# EAGLE board Schematic_tema_tsc_pcb (EAGLE 9.7.0)
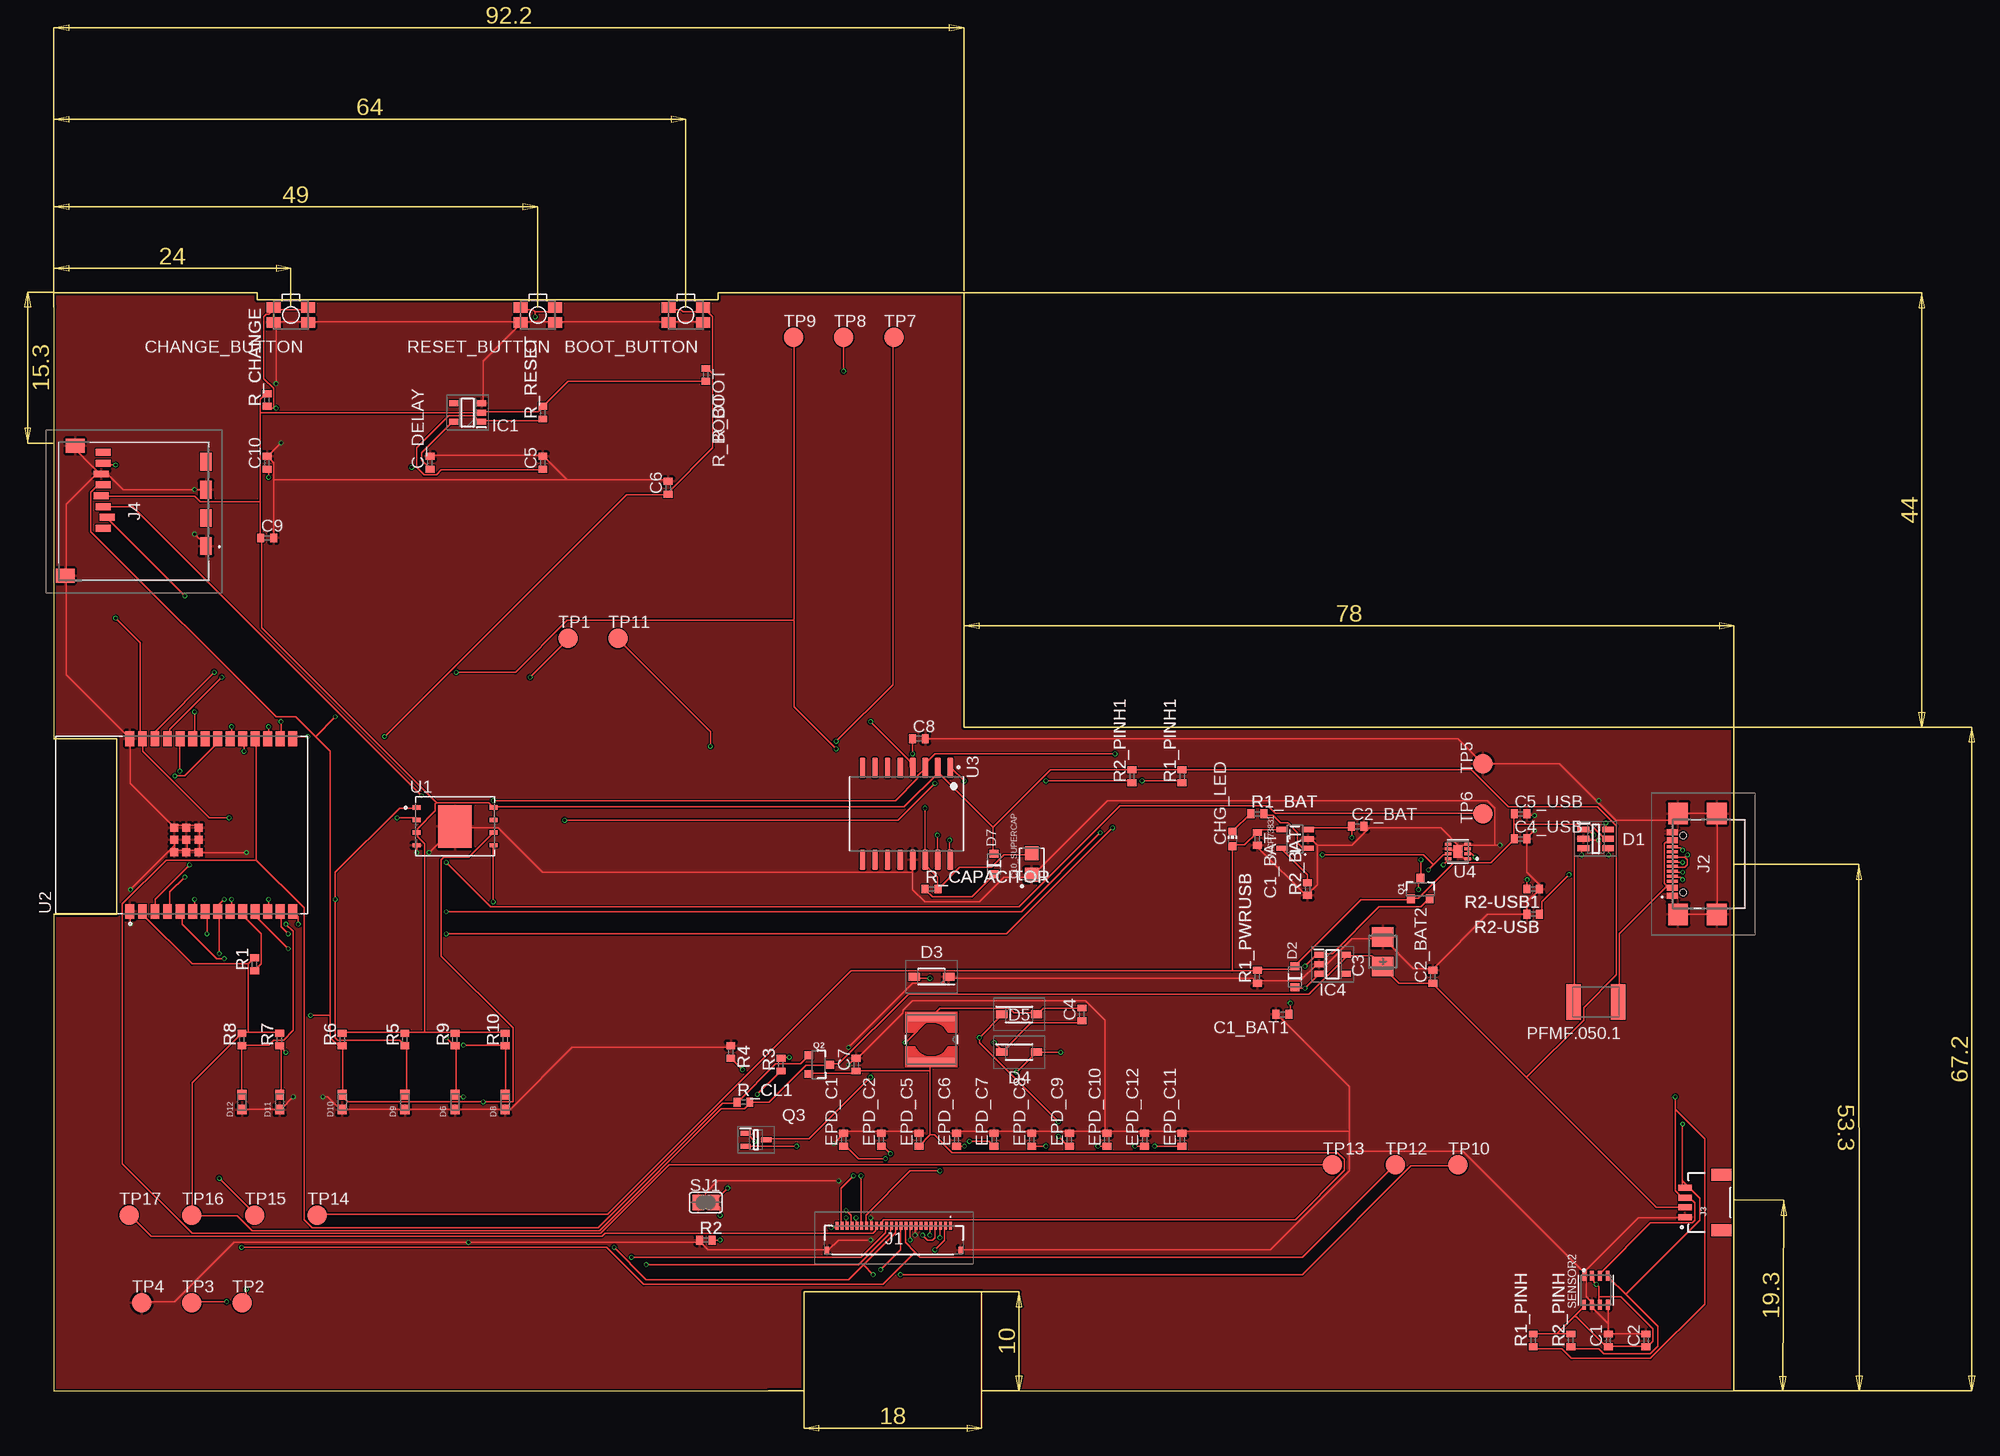
[diagram p0: board, top side]
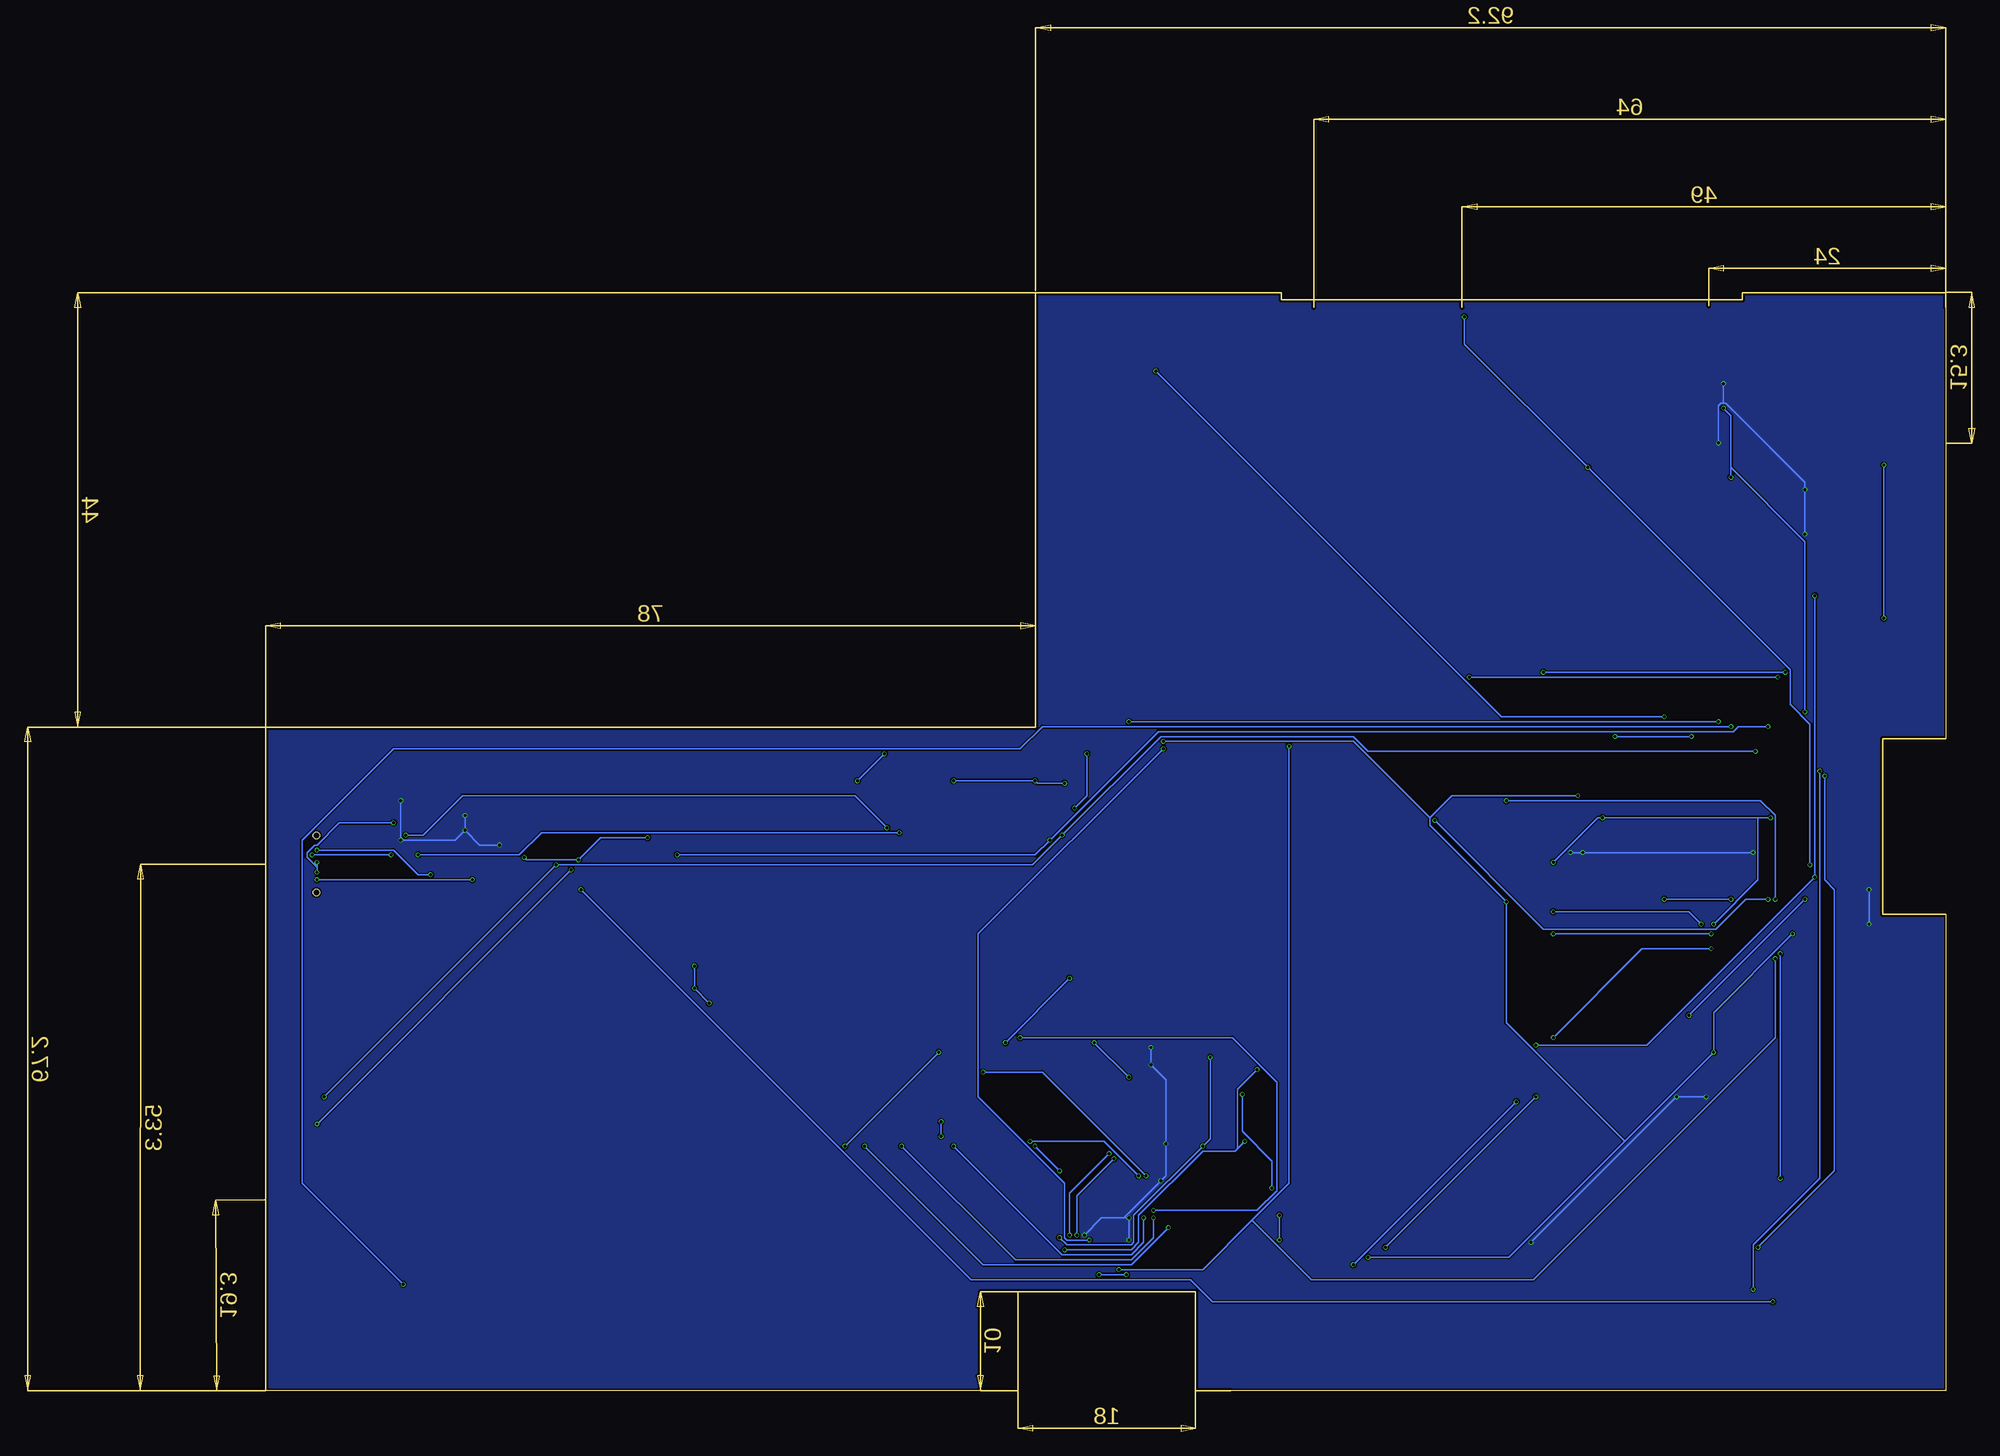
[diagram p1: board, bottom side, seen from below]

Size 170.2 x 111.2 mm. Coordinates in mm from the lower left corner, seen from the top.
Outline: 0,0 72.39,0 75.98,0 75.98,10 93.98,10 93.98,0 170.2,0 170.2,67.2 92.2,67.2 92.2,111.2 67.28,111.2 67.28,110.49 20.61,110.49 20.61,111.2 0,111.2 0,66.04 6.35,66.04 6.35,48.26 0,48.26 0,0
Copper layers (1*16): Top 0.035mm / dielectric 1.6mm / Bottom 0.035mm
Design rules "jlcpcb-2layers.dru": minimum track width 0.15mm, minimum drill 0.3mm, track to track 5mil, track to pad 5mil, pad to pad 5mil, via to via 5mil, smd to smd 5mil, copper to edge 0.2mm, drill to drill 6mil, minimum pad ring 10mil, minimum via ring 3mil, stop-mask expansion 4mil, vias tented up to drill 0mil, thermal gap 10mil

## Footprints (pad centres in the part's own frame; a part is rotated, then mirrored left to right if it is on the bottom)
MYBUTTON = smd 1.4 x 1.05: 1 1.75,0.75; 2 -1.75,0.75; 3 -1.75,-0.75; 4 1.75,-0.75
EAGLE-LTSPICE_C0402 = smd 0.7 x 0.9: 1 -0.65,0; 2 0.65,0
RCL_CT3528 = smd 2 x 2.2: + -1.5,0; - 1.5,0
CAPCP3225X100N = smd 1.4 x 1.4: 1 -1.1,0; 2 1.1,0
ADAFRUIT_CHIP-LED0603 = smd 0.8 x 0.8: A 0,-0.75; C 0,0.75
SOT95P280X145-6N = smd 1.2 x 0.6: 1 -1.25,0.95; 2 -1.25,0; 3 -1.25,-0.95; 4 1.25,-0.95; 5 1.25,0; 6 1.25,0.95
ESP32_WROVER_AVX---SD0805S020S1R0_AVX_SD0805S020S1R0_0 = smd 0.8 x 0.9: 1 -1.05,0; 2 1.05,0
SOD3716X135N = smd 1.15 x 0.8: 1 -1.75,0; 2 1.75,0
DIOC1608X36N = smd 0.97 x 0.94: 1 -0.75,0; 2 0.75,0
SOT95P280X125-5N = smd 0.9 x 0.6: 1 -1.4,0.95; 2 -1.4,0; 3 -1.4,-0.95; 4 1.4,-0.95; 5 1.4,0.95
SOT95P280X120-5N = smd 0.9 x 0.6: 1 -1.4,0.95; 2 -1.4,0; 3 -1.4,-0.95; 4 1.4,-0.95; 5 1.4,0.95
FH34SRJ24S05SH99 = smd 0.3 x 0.8: 1 5.75,1.45; 2 5.25,1.45; 3 4.75,1.45; 4 4.25,1.45; 5 3.75,1.45; 6 3.25,1.45; 7 2.75,1.45; 8 2.25,1.45; 9 1.75,1.45; 10 1.25,1.45; 11 0.75,1.45; 12 0.25,1.45; 13 -0.25,1.45; 14 -0.75,1.45; 15 -1.25,1.45; 16 -1.75,1.45; 17 -2.25,1.45; 18 -2.75,1.45; 19 -3.25,1.45; 20 -3.75,1.45; 21 -4.25,1.45; 22 -4.75,1.45; 23 -5.25,1.45; 24 -5.75,1.45 | smd 0.4 x 0.8: MP1 6.75,-1.05; MP2 -6.75,-1.05
SAMACSYS_PARTS_USB4110GFA = smd 0.3 x 1.15: A1 -3.35,3.678; A4 -2.55,3.678; A5 -1.25,3.678; A6 -0.25,3.678; A7 0.25,3.678; A8 1.25,3.678; A9 2.55,3.678; A12 3.35,3.678; B1 3.05,3.678; B4 2.25,3.678; B5 1.75,3.678; B6 0.75,3.678; B7 -0.75,3.678; B8 -1.75,3.678; B9 -2.25,3.678; B12 -3.05,3.678 | smd 2.18 x 2: MP1 -5.11,-0.827; MP2 5.11,-0.827; MP3 -5.11,3.103; MP4 5.11,3.103 | hole 0.65: -2.89,2.603; 2.89,2.603
JST04_1MM_RA = smd 0.6 x 1.35: 1 -1.5,0; 2 -0.5,0; 3 0.5,0; 4 1.5,0 | smd 1.2 x 2: NC1 2.8,-3.675; NC2 -2.8,-3.675
112ATAARR03ATTEND = smd 1.8 x 1.2: G1 10.6,10.4; G2 4.9,10.4; S1 7.75,10.4; S2 2.05,10.4 | smd 1.4 x 1.9: G3 13.6,-3.85; G4 0.45,-2.85 | smd 0.7 x 1.5: P1 8.8,0; P2 7.7,0.4; P3 6.6,0; P4 5.5,-0.2; P5 4.4,0; P6 3.3,-0.2; P7 2.2,0; P8 1.1,0
IND_4828-WE-TPC_WRE = smd 0.889 x 4.826: 1 -2.286,0; 2 2.286,0
ESP32_WROVER_SPARKFUN-IC-POWER_SOT23-5 = smd 0.55 x 1.2: 1 -0.95,-1.3; 2 0,-1.3; 3 0.95,-1.3; 4 0.95,1.3; 5 -0.95,1.3
ESP32C6_VARISTOR_CT/CN1812 = smd 1.5 x 3.6: 1 -2.25,0; 2 2.25,0
ESP32_WROVER_SPARKFUN-DISCRETESEMI_SOT23-3 = smd 0.8 x 0.9: 1 -0.95,-1; 2 0.95,-1; 3 0,1.1
SOT65P210X110-3N = smd 1.05 x 0.5: 1 -1.05,0.65; 2 -1.05,-0.65; 3 1.05,0
ESP32_WROVER_EAGLE-LTSPICE_R0402 = smd 0.7 x 0.9: 1 -0.65,0; 2 0.65,0
ESP32_WROVER_BME680_PSON80P300X300X100-8N = smd 1.016 x 0.5: 1 1.458,1.2; 2 1.458,0.4; 3 1.458,-0.4; 4 1.458,-1.2; 5 -1.458,-1.22; 6 -1.458,-0.4; 7 -1.458,0.4; 8 -1.458,1.2
SJ = smd 1.168 x 1.6: 1 -0.762,0; 2 0.762,0
TP20R = smd 2 x 2: TP 0,0
SON127P600X800X80-9N = smd 0.94 x 0.44: 1 -3.895,1.905; 2 -3.895,0.635; 3 -3.895,-0.635; 4 -3.895,-1.905; 5 3.895,-1.905; 6 3.895,-0.635; 7 3.895,0.635; 8 3.895,1.905 | smd 3.4 x 4.3: 9 0,0
XCVR_ESP32-C6-WROOM-1-N8 = smd 1.5 x 0.9: 1 -8.75,5.26; 2 -8.75,3.99; 3 -8.75,2.72; 4 -8.75,1.45; 5 -8.75,0.18; 6 -8.75,-1.09; 7 -8.75,-2.36; 8 -8.75,-3.63; 9 -8.75,-4.9; 10 -8.75,-6.17; 11 -8.75,-7.44; 12 -8.75,-8.71; 13 -8.75,-9.98; 14 -8.75,-11.25; 15 8.75,-11.25; 16 8.75,-9.98; 17 8.75,-8.71; 18 8.75,-7.44; 19 8.75,-6.17; 20 8.75,-4.9; 21 8.75,-3.63; 22 8.75,-2.36; 23 8.75,-1.09; 24 8.75,0.18; 25 8.75,1.45; 26 8.75,2.72; 27 8.75,3.99; 28 8.75,5.26 | smd 0.8 x 0.8: 29_1 -2.755,0.79; 29_2 -1.505,0.79; 29_3 -0.255,0.79; 29_4 -2.755,-0.46; 29_5 -1.505,-0.46; 29_6 -0.255,-0.46; 29_7 -2.755,-1.71; 29_8 -1.505,-1.71; 29_9 -0.255,-1.71
SOIC127P1032X265-16N = smd 2.05 x 0.59: 1 -4.655,4.445; 2 -4.655,3.175; 3 -4.655,1.905; 4 -4.655,0.635; 5 -4.655,-0.635; 6 -4.655,-1.905; 7 -4.655,-3.175; 8 -4.655,-4.445; 9 4.655,-4.445; 10 4.655,-3.175; 11 4.655,-1.905; 12 4.655,-0.635; 13 4.655,0.635; 14 4.655,1.905; 15 4.655,3.175; 16 4.655,4.445
SON50P200X200X80-9N = smd 0.76 x 0.27: 1 -0.985,0.75; 2 -0.985,0.25; 3 -0.985,-0.25; 4 -0.985,-0.75; 5 0.985,-0.75; 6 0.985,-0.25; 7 0.985,0.25; 8 0.985,0.75 | smd 0.9 x 1.3: 9 0,0

## Placement (x,y rotation side)
BOOT_BUTTON  BUTTON_CUSYOMV1  [MYBUTTON]  64.01,108.94 180 top
C1  100nF  [EAGLE-LTSPICE_C0402]  157.48,5.08 90 top
C1_BAT  4.7uF  [EAGLE-LTSPICE_C0402]  121.92,55.88 270 top
C1_BAT1  4.7uF  [EAGLE-LTSPICE_C0402]  124.46,38.1 180 top
C2  100nF  [EAGLE-LTSPICE_C0402]  161.29,5.08 90 top
C2_BAT  4.7uF  [EAGLE-LTSPICE_C0402]  132.08,57.15 0 top
C2_BAT2  4.7uF  [EAGLE-LTSPICE_C0402]  139.7,41.91 90 top
C3  100uF  [RCL_CT3528]  134.62,44.45 90 top
C4  4.7uF/25V  [EAGLE-LTSPICE_C0402]  104.14,38.1 90 top
C4_USB  100nF  [EAGLE-LTSPICE_C0402]  148.59,55.88 0 top
C5  1uF  [EAGLE-LTSPICE_C0402]  49.53,93.98 90 top
C5_USB  4.7uF  [EAGLE-LTSPICE_C0402]  148.59,58.42 0 top
C6  100nF  [EAGLE-LTSPICE_C0402]  62.23,91.44 90 top
C7  10uF  [EAGLE-LTSPICE_C0402]  81.28,33.02 90 top
C8  100nF  [EAGLE-LTSPICE_C0402]  87.63,66.04 0 top
C9  100nF  [EAGLE-LTSPICE_C0402]  21.59,86.36 0 top
C10  100nF  [EAGLE-LTSPICE_C0402]  21.59,93.98 90 top
C10_SUPERCAP  CPH3225A  [CAPCP3225X100N]  99.06,53.34 90 top
C_DELAY  100nF  [EAGLE-LTSPICE_C0402]  38.1,93.98 90 top
CHANGE_BUTTON  BUTTON_CUSYOMV1  [MYBUTTON]  24,108.94 180 top
CHG_LED  [ADAFRUIT_CHIP-LED0603]  119.38,55.88 0 top
D1  USBLC6-2SC6Y  [SOT95P280X145-6N]  156.21,55.88 0 top
D2  ESP32_WROVER_AVX---SD0805S020S1R0_AVX_SD0805S020S1R0_0_0AVX_SD0805S020S1R0_0_0  [ESP32_WROVER_AVX---SD0805S020S1R0_AVX_SD0805S020S1R0_0]  125.73,41.91 90 top
D3  MBR0530  [SOD3716X135N]  88.9,41.91 180 top
D4  MBR0530  [SOD3716X135N]  97.79,34.29 0 top
D5  MBR0530  [SOD3716X135N]  97.79,38.1 0 top
D6  PGB1010603MR  [DIOC1608X36N]  40.64,29.21 90 top
D7  ESP32_WROVER_AVX---SD0805S020S1R0_AVX_SD0805S020S1R0_0_0AVX_SD0805S020S1R0_0_0  [ESP32_WROVER_AVX---SD0805S020S1R0_AVX_SD0805S020S1R0_0]  95.25,53.34 90 top
D8  PGB1010603MR  [DIOC1608X36N]  45.72,29.21 90 top
D9  PGB1010603MR  [DIOC1608X36N]  35.56,29.21 90 top
D10  PGB1010603MR  [DIOC1608X36N]  29.21,29.21 90 top
D11  PGB1010603MR  [DIOC1608X36N]  22.86,29.21 90 top
D12  PGB1010603MR  [DIOC1608X36N]  19.05,29.21 90 top
EPD_C1  1uF/50V  [EAGLE-LTSPICE_C0402]  80.01,25.4 90 top
EPD_C2  1uF/50V  [EAGLE-LTSPICE_C0402]  83.82,25.4 90 top
EPD_C5  0.1uF  [EAGLE-LTSPICE_C0402]  87.63,25.4 90 top
EPD_C6  1uF/50V  [EAGLE-LTSPICE_C0402]  91.44,25.4 90 top
EPD_C7  1uF/50V  [EAGLE-LTSPICE_C0402]  95.25,25.4 90 top
EPD_C8  1uF/50V  [EAGLE-LTSPICE_C0402]  99.06,25.4 90 top
EPD_C9  1uF/50V  [EAGLE-LTSPICE_C0402]  102.87,25.4 90 top
EPD_C10  1uF/50V  [EAGLE-LTSPICE_C0402]  106.68,25.4 90 top
EPD_C11  1uF/50V  [EAGLE-LTSPICE_C0402]  114.3,25.4 90 top
EPD_C12  1uF/50V  [EAGLE-LTSPICE_C0402]  110.49,25.4 90 top
IC1  BD5229G-TR  [SOT95P280X125-5N]  41.91,99.06 180 top
IC4  XC6220A331MR-G  [SOT95P280X120-5N]  129.54,43.18 0 top
J1  FH34SRJ-24S-0.5SH_99_  [FH34SRJ24S05SH99]  85.09,15.24 0 top
J2  SAMACSYS_PARTS_USB4110-GF-A  [SAMACSYS_PARTS_USB4110GFA]  167.64,53.34 90 top
J3  QWIIC_RIGHT_ANGLE  [JST04_1MM_RA]  165.25,19.05 90 top
J4  112A-TAAR-R03_ATTEND  [112ATAARR03ATTEND]  5,96.14 270 top
L1  68uF  [IND_4828-WE-TPC_WRE]  88.9,35.56 270 top
MCP73831  ESP32_WROVER_SPARKFUN-IC-POWER_MCP73831  [ESP32_WROVER_SPARKFUN-IC-POWER_SOT23-5]  125.73,55.88 90 top
PFMF.050.1  ESP32C6_VARISTORCN1812  [ESP32C6_VARISTOR_CT/CN1812]  156.21,39.37 180 top
Q1  20V/4.2A/52mΩ/1.4W  [ESP32_WROVER_SPARKFUN-DISCRETESEMI_SOT23-3]  138.43,50.8 0 top
Q2  20V/4.2A/52mΩ/1.4W  [ESP32_WROVER_SPARKFUN-DISCRETESEMI_SOT23-3]  77.47,33.02 270 top
Q3  SI1308EDL-T1-GE3  [SOT65P210X110-3N]  71.12,25.4 0 top
R1  10K  [ESP32_WROVER_EAGLE-LTSPICE_R0402]  20.32,43.18 90 top
R1_BAT  200  [ESP32_WROVER_EAGLE-LTSPICE_R0402]  121.92,58.42 0 top
R1_PINH  10K  [ESP32_WROVER_EAGLE-LTSPICE_R0402]  149.86,5.08 90 top
R1_PINH1  10K  [ESP32_WROVER_EAGLE-LTSPICE_R0402]  114.3,62.23 90 top
R1_PWRUSB  100K  [ESP32_WROVER_EAGLE-LTSPICE_R0402]  121.92,41.91 90 top
R2  2.2  [ESP32_WROVER_EAGLE-LTSPICE_R0402]  66.04,15.24 0 top
R2-USB  5k1  [ESP32_WROVER_EAGLE-LTSPICE_R0402]  149.86,48.26 180 top
R2-USB1  5k1  [ESP32_WROVER_EAGLE-LTSPICE_R0402]  149.86,50.8 180 top
R2_BAT  2K  [ESP32_WROVER_EAGLE-LTSPICE_R0402]  127,50.8 90 top
R2_PINH  10K  [ESP32_WROVER_EAGLE-LTSPICE_R0402]  153.67,5.08 90 top
R2_PINH1  10K  [ESP32_WROVER_EAGLE-LTSPICE_R0402]  109.22,62.23 90 top
R3  0.47  [ESP32_WROVER_EAGLE-LTSPICE_R0402]  73.66,33.02 90 top
R4  10K  [ESP32_WROVER_EAGLE-LTSPICE_R0402]  68.58,34.29 270 top
R5  10K  [ESP32_WROVER_EAGLE-LTSPICE_R0402]  35.56,35.56 90 top
R6  10K  [ESP32_WROVER_EAGLE-LTSPICE_R0402]  29.21,35.56 90 top
R7  10K  [ESP32_WROVER_EAGLE-LTSPICE_R0402]  22.86,35.56 90 top
R8  10K  [ESP32_WROVER_EAGLE-LTSPICE_R0402]  19.05,35.56 90 top
R9  10K  [ESP32_WROVER_EAGLE-LTSPICE_R0402]  40.64,35.56 90 top
R10  10K  [ESP32_WROVER_EAGLE-LTSPICE_R0402]  45.72,35.56 90 top
R_BOOT  10K  [ESP32_WROVER_EAGLE-LTSPICE_R0402]  66.04,102.87 270 top
R_CAPACITOR  15  [ESP32_WROVER_EAGLE-LTSPICE_R0402]  88.9,50.8 0 top
R_CHANGE  10K  [ESP32_WROVER_EAGLE-LTSPICE_R0402]  21.59,100.33 90 top
R_CL1  10K  [ESP32_WROVER_EAGLE-LTSPICE_R0402]  69.85,29.21 0 top
R_RESET  10K  [ESP32_WROVER_EAGLE-LTSPICE_R0402]  49.53,99.06 90 top
RESET_BUTTON  BUTTON_CUSYOMV1  [MYBUTTON]  49.02,108.94 180 top
SENSOR2  ESP32_WROVER_BME680_BME680  [ESP32_WROVER_BME680_PSON80P300X300X100-8N]  156.21,10.16 90 top
SJ1  [SJ]  66.04,19.05 0 top
TP1  TPTP20R  [TP20R]  52.07,76.2 0 top
TP2  TPTP20R  [TP20R]  19.05,8.89 0 top
TP3  TPTP20R  [TP20R]  13.97,8.89 0 top
TP4  TPTP20R  [TP20R]  8.89,8.89 0 top
TP5  TPTP20R  [TP20R]  144.78,63.5 90 top
TP6  TPTP20R  [TP20R]  144.78,58.42 90 top
TP7  TPTP20R  [TP20R]  85.09,106.68 0 top
TP8  TPTP20R  [TP20R]  80.01,106.68 0 top
TP9  TPTP20R  [TP20R]  74.93,106.68 0 top
TP10  TPTP20R  [TP20R]  142.24,22.86 0 top
TP11  TPTP20R  [TP20R]  57.15,76.2 0 top
TP12  TPTP20R  [TP20R]  135.89,22.86 0 top
TP13  TPTP20R  [TP20R]  129.54,22.86 0 top
TP14  TPTP20R  [TP20R]  26.67,17.78 0 top
TP15  TPTP20R  [TP20R]  20.32,17.78 0 top
TP16  TPTP20R  [TP20R]  13.97,17.78 0 top
TP17  TPTP20R  [TP20R]  7.62,17.78 0 top
U1  W25Q512JVEIQ  [SON127P600X800X80-9N]  40.64,57.15 0 top
U2  ESP32-C6-WROOM-1-N8  [XCVR_ESP32-C6-WROOM-1-N8]  12.95,57.28 90 top
U3  DS3231SN#  [SOIC127P1032X265-16N]  86.36,58.42 270 top
U4  MAX17048G+T10  [SON50P200X200X80-9N]  142.24,54.61 180 top

## Library data of the parts
BOOT_BUTTON CHANGE_BUTTON CHG_LED PFMF.050.1 RESET_BUTTON SJ1 TP1-TP17 = DeskAssistant v19 v1
C1 C1_BAT C1_BAT1 C2 C2_BAT C2_BAT2 C4 C4_USB C5 C5_USB C6-C10 C_DELAY EPD_C1 EPD_C2 EPD_C5-EPD_C12 = DeskAssistant v19 v1; SPICEMODEL: NONE; SPICEPREFIX: C
C3 = DeskAssistant v19 v1; SPICEPREFIX: C
C10_SUPERCAP = DeskAssistant v19 v1; AVAILABILITY: Not in stock; CHECK_PRICES: https://www.snapeda.com/parts/CPH3225A/Seiko+Instruments/view-part/?ref=eda; DESCRIPTION: 11 mF (EDLC) Supercapacitor 3.3 V 1210 (3225 Metric) - -; MF: Seiko Instruments; MP: CPH3225A; PACKAGE: 1210 Seiko; PRICE: None; PURCHASE-URL: https://www.snapeda.com/api/url_track_click_mouser/?unipart_id=562593&manufacturer=Seiko Instruments&part_name=CPH3225A&search_term=None; SNAPEDA_LINK: https://www.snapeda.com/parts/CPH3225A/Seiko+Instruments/view-part/?ref=snap
D1 = DeskAssistant v19 v1; AVAILABILITY: In Stock; CHECK_PRICES: https://www.snapeda.com/parts/USBLC6-2SC6Y/STMicroelectronics/view-part/?ref=eda; DESCRIPTION: 17V Clamp 5A (8/20µs) Ipp Tvs Diode Surface Mount SOT-23-6; MF: STMicroelectronics; MP: USBLC6-2SC6Y; PACKAGE: SOT-23-6 STMicroelectronics; PRICE: None; SNAPEDA_LINK: https://www.snapeda.com/parts/USBLC6-2SC6Y/STMicroelectronics/view-part/?ref=snap
D2 D7 = DeskAssistant v19 v1; CENTROID_NOT_SPECIFIED: No; DATASHEET: http://datasheets.avx.com/schottky.pdf; DIGIKEY_DESCRIPTION: DIODE SCHOTTKY 20V 1A 0805; DIGIKEY_PART_NUMBER: 478-7800-1-ND; LEAD_FREE: yes; MF: AVX; MOUSER_PART_NUMBER: 581-SD0805S020S1R0; PACKAGE: 0805 (2012 metric); PREFIX: D; ROHS: yes; TEMPERATURE_RANGE_HIGH: +125°C; TEMPERATURE_RANGE_LOW: -55°C
D3-D5 = DeskAssistant v19 v1; AVAILABILITY: In Stock; CHECK_PRICES: https://www.snapeda.com/parts/MBR0530/Onsemi/view-part/?ref=eda; DESCRIPTION: Diode Schottky 30 V 500mA Surface Mount SOD-123; MF: ON Semiconductor; MP: MBR0530; PACKAGE: SOD-123-2 ON Semiconductor; PRICE: None; PURCHASE-URL: https://www.snapeda.com/api/url_track_click_mouser/?unipart_id=179458&manufacturer=ON Semiconductor&part_name=MBR0530&search_term=None; SNAPEDA_LINK: https://www.snapeda.com/parts/MBR0530/Onsemi/view-part/?ref=snap
D6 D8-D12 = DeskAssistant v19 v1; AVAILABILITY: In Stock; CHECK_PRICES: https://www.snapeda.com/parts/PGB1010603MR/Littelfuse/view-part/?ref=eda; DESCRIPTION: 150V (Typ) Clamp - Ipp Tvs Diode Surface Mount 0603 (1608 Metric); MF: Littelfuse Inc.; MP: PGB1010603MR; PACKAGE: 0603 Littelfuse Inc.; PRICE: None; PURCHASE-URL: https://www.snapeda.com/api/url_track_click_mouser/?unipart_id=5659453&manufacturer=Littelfuse Inc.&part_name=PGB1010603MR&search_term=None; SNAPEDA_LINK: https://www.snapeda.com/parts/PGB1010603MR/Littelfuse/view-part/?ref=snap
IC1 = DeskAssistant v19 v1; DESCRIPTION: Voltage Detector with Adjustable Delay Time: CMOS processes are utilized to develop high precision, low current consumption CMOS reset ICs that allow arbitrary setting of the delay time. The extensive lineup includes both Nch Open Drain and CMOS output types in a wide range of detection voltages (from 2.3V to 6.0V, in 0.1V steps), enabling selection of the ideal solution based on customer requirements. In addition, the entire series is of course both lead-free and RoHS-compliant.; HEIGHT: 1.25mm; MANUFACTURER_NAME: ROHM Semiconductor; MANUFACTURER_PART_NUMBER: BD5229G-TR; MOUSER_PART_NUMBER: 755-BD5229G-TR; MOUSER_PRICE-STOCK: https://www.mouser.co.uk/ProductDetail/ROHM-Semiconductor/BD5229G-TR?qs=4kLU8WoGk0vvnhrrYwdszw%3D%3D
IC4 = DeskAssistant v19 v1; DESCRIPTION: LDO Voltage Regulators; HEIGHT: 1.2mm; MANUFACTURER_NAME: Torex; MANUFACTURER_PART_NUMBER: XC6220A331MR-G; MOUSER_PART_NUMBER: 865-XC6220A331MR-G; MOUSER_PRICE-STOCK: https://www.mouser.co.uk/ProductDetail/Torex-Semiconductor/XC6220A331MR-G?qs=AsjdqWjXhJ8ZSWznL1J0gg%3D%3D
J1 = DeskAssistant v19 v1; DESCRIPTION: 24 Position FFC, FPC Connector Contacts, Top and Bottom 0.020" (0.50mm) Surface Mount, Right Angle; HEIGHT: 1.1mm; MANUFACTURER_NAME: Hirose; MANUFACTURER_PART_NUMBER: FH34SRJ-24S-0.5SH(99); MOUSER_PART_NUMBER: 798-FH34SRJ24S05SH99; MOUSER_PRICE-STOCK: https://www.mouser.co.uk/ProductDetail/Hirose-Connector/FH34SRJ-24S-0.5SH99?qs=vcbW%252B4%252BSTIpKBl5ap9J8Fw%3D%3D
J2 = DeskAssistant v19 v1; DESCRIPTION: CONN USB 2.0 TYPE-C R/A SMT; HEIGHT: 3.26mm; MANUFACTURER_NAME: GCT (GLOBAL CONNECTOR TECHNOLOGY); MANUFACTURER_PART_NUMBER: USB4110-GF-A; MOUSER_PART_NUMBER: 640-USB4110-GF-A; MOUSER_PRICE-STOCK: https://www.mouser.co.uk/ProductDetail/GCT/USB4110-GF-A?qs=KUoIvG%2F9IlYiZvIXQjyJeA%3D%3D
J3 = DeskAssistant v19 v1; PROD_ID: CONN-13694
J4 = DeskAssistant v19 v1; DESCRIPTION: Micro SD Card Socket, Push-Push Type, Top Mount, SMT, H=1.83mm, 10u; HEIGHT: 1.9mm; MANUFACTURER_NAME: ATTEND; MANUFACTURER_PART_NUMBER: 112A-TAAR-R03 ATTEND
L1 = DeskAssistant v19 v1; COPYRIGHT: Copyright (C) 2024 Ultra Librarian. All rights reserved.; MANUFACTURER_PART_NUMBER: 744043680; MFR_NAME: Wurth Electronics
MCP73831 = DeskAssistant v19 v1; PROD_ID: IC-09995
Q1 Q2 = DeskAssistant v19 v1; PROD_ID: TRAN-14388
Q3 = DeskAssistant v19 v1; AVAILABILITY: In Stock; CHECK_PRICES: https://www.snapeda.com/parts/SI1308EDL-T1-GE3/Vishay+Siliconix/view-part/?ref=eda; DESCRIPTION: Si1308EDL-T1-GE3 N-channel MOSFET Transistor, 1.5 A, 30 V, 3-Pin SC-70 | Siliconix / Vishay SI1308EDL-T1-GE3; MF: Vishay Siliconix; MP: SI1308EDL-T1-GE3; PACKAGE: SOT-323 Vishay Semiconductor; PRICE: None; PURCHASE-URL: https://www.snapeda.com/api/url_track_click_mouser/?unipart_id=274603&manufacturer=Vishay Siliconix&part_name=SI1308EDL-T1-GE3&search_term=None; SNAPEDA_LINK: https://www.snapeda.com/parts/SI1308EDL-T1-GE3/Vishay+Siliconix/view-part/?ref=snap
R1 R1_BAT R1_PINH R1_PINH1 R1_PWRUSB R2 R2-USB R2-USB1 R2_BAT R2_PINH R2_PINH1 R3-R10 R_BOOT R_CAPACITOR R_CHANGE R_CL1 R_RESET = DeskAssistant v19 v1; SPICEMODEL: NONE; SPICEPREFIX: R
SENSOR2 = DeskAssistant v19 v1; AVAILABILITY: Unavailable; DESCRIPTION: Integrated Environmental Unit; MF: Bosch Sensortec; MP: BME680; PACKAGE: LGA-8 Bosch Tools; PRICE: None
U1 = DeskAssistant v19 v1; AVAILABILITY: In Stock; CHECK_PRICES: https://www.snapeda.com/parts/W25Q512JVEIQ/Winbond+Electronics/view-part/?ref=eda; DESCRIPTION: FLASH - NOR Memory IC 512Mb (64M x 8) SPI - Quad I/O 133 MHz 8-WSON (8x6); MF: Winbond Electronics; MP: W25Q512JVEIQ; PACKAGE: Package; PRICE: None; SNAPEDA_LINK: https://www.snapeda.com/parts/W25Q512JVEIQ/Winbond+Electronics/view-part/?ref=snap
U2 = DeskAssistant v19 v1; AVAILABILITY: In Stock; CHECK_PRICES: https://www.snapeda.com/parts/ESP32-C6-WROOM-1-N8/Espressif+Systems/view-part/?ref=eda; DESCRIPTION: Multiprotocol Modules ESP32-C6 module, Wi-Fi 6 in 2.4 GHz band, Bluetooth 5, Zigbee 3.0 and Thread. ESP34-WROOM Compatible - ENGINEERING SAMPLE; MF: Espressif Systems; MP: ESP32-C6-WROOM-1-N8; PACKAGE: None; PRICE: None; SNAPEDA_LINK: https://www.snapeda.com/parts/ESP32-C6-WROOM-1-N8/Espressif+Systems/view-part/?ref=snap
U3 = DeskAssistant v19 v1; AVAILABILITY: In Stock; CHECK_PRICES: https://www.snapeda.com/parts/DS3231SN%23/Analog+Devices/view-part/?ref=eda; DESCRIPTION: Extremely Accurate I²C-Integrated RTC/TCXO/Crystal; MF: Analog Devices; MP: DS3231SN#; PACKAGE: SOIC-16 Maxim; PRICE: None; PURCHASE-URL: https://www.snapeda.com/api/url_track_click_mouser/?unipart_id=99048&manufacturer=Analog Devices&part_name=DS3231SN#&search_term=None; SNAPEDA_LINK: https://www.snapeda.com/parts/DS3231SN%23/Analog+Devices/view-part/?ref=snap
U4 = DeskAssistant v19 v1; AVAILABILITY: In Stock; CHECK_PRICES: https://www.snapeda.com/parts/MAX17048G+T10/Analog+Devices/view-part/?ref=eda; DESCRIPTION: 3µA 1-Cell/2-Cell Fuel Gauge with ModelGauge; MF: Analog Devices; MP: MAX17048G+T10; PACKAGE: TDFN-8 Maxim; PRICE: None; PURCHASE-URL: https://www.snapeda.com/api/url_track_click_mouser/?unipart_id=329239&manufacturer=Analog Devices&part_name=MAX17048G+T10&search_term=None; SNAPEDA_LINK: https://www.snapeda.com/parts/MAX17048G+T10/Analog+Devices/view-part/?ref=snap

## Nets
3V3: C2_BAT2.1 C3.+ C9.1 D7.2 IC1.2 IC4.5 J3.2 J4.P4 Q2.3 R1.2 R1_PINH1.2 R2_PINH1.2 R5.2 R6.2 R7.2 R8.2 R9.2 R10.2 R_BOOT.2 R_CHANGE.2 R_CL1.2 R_RESET.2 TP16.TP U1.3 U1.7 U1.8 U2.2 U3.2
32KHZ: R2_PINH1.1 U2.9 U3.1
DN: D1.6 J2.A7 J2.B7
DP: D1.4 J2.A6 J2.B6
EPD_3V3: C7.1 EPD_C5.1 J1.15 J1.16 L1.2 Q2.2 TP17.TP
EPD_3V3_C: Q2.1 R_CL1.1 TP13.TP U2.18
EPD_BUSY: J1.9 TP9.TP U2.26
EPD_CS: D6.2 J1.12 R9.1 TP10.TP U2.11
EPD_DC: J1.11 TP11.TP U2.5
EPD_RST: J1.10 TP12.TP U2.21
FLASH_CS: D9.2 R5.1 U1.1 U2.12
GDR: J1.2 Q3.1 R4.2
GND: BOOT_BUTTON.1 BOOT_BUTTON.2 C1.2 C1_BAT1.2 C1_BAT.2 C2.2 C2_BAT2.2 C2_BAT.2 C3.- C4_USB.2 C5.2 C5_USB.2 C6.2 C7.2 C8.2 C9.2 C10.2 C10_SUPERCAP.1 C_DELAY.2 CHANGE_BUTTON.1 CHANGE_BUTTON.2 D1.2 D3.1 D6.1 D8.1 D9.1 D10.1 D11.1 D12.1 EPD_C1.2 EPD_C2.2 EPD_C5.2 EPD_C6.2 EPD_C7.2 EPD_C8.2 EPD_C9.2 EPD_C10.2 EPD_C11.2 EPD_C12.2 IC1.3 IC4.2 J1.8 J1.17 J1.MP1 J1.MP2 J2.A1 J2.A12 J2.B1 J2.B12 J2.MP1 J2.MP2 J2.MP3 J2.MP4 J3.1 J4.G1 J4.G2 J4.G3 J4.G4 J4.P6 MCP73831.2 R1_PWRUSB.1 R2-USB1.1 R2-USB.2 R2.1 R2_BAT.1 R4.1 RESET_BUTTON.1 RESET_BUTTON.2 SENSOR2.1 SENSOR2.5 SENSOR2.7 SJ1.1 TP4.TP TP5.TP U1.4 U1.9 U2.1 U2.28 U2.29_1 U2.29_2 U2.29_3 U2.29_4 U2.29_5 U2.29_6 U2.29_7 U2.29_8 U2.29_9 U3.13 U4.1 U4.4 U4.6 U4.9
GPIO8: R1.1 U2.10
I2C_PW: C1.1 C2.1 R1_PINH.2 R2_PINH.2 SENSOR2.2 SENSOR2.6 SENSOR2.8 U2.17
INT_RTC: R1_PINH1.1 TP15.TP U2.8 U3.3
IO/BOOT: BOOT_BUTTON.3 BOOT_BUTTON.4 C6.1 R_BOOT.1 U2.15
IO/CHANGE: C10.1 CHANGE_BUTTON.3 CHANGE_BUTTON.4 R_CHANGE.1 U2.23
MISO: D12.2 J4.P7 R8.1 TP6.TP U1.2 U2.27
MOSI: D11.2 J1.14 J4.P3 R7.1 TP7.TP U1.5 U2.7
N$1: EPD_C12.1 J1.24
N$2: EPD_C10.1 J1.22
N$3: J2.A5 R2-USB1.2
N$4: CHG_LED.C R1_BAT.1
N$5: C1_BAT1.1 D2.1 IC4.1 IC4.3 Q1.2
N$6: C4.1 D3.2 D4.1
N$7: MCP73831.1 R1_BAT.2
N$8: EPD_C8.1 J1.20
N$9: MCP73831.5 R2_BAT.2
N$10: EPD_C7.1 J1.19
N$11: J2.B5 R2-USB.1
N$12: EPD_C6.1 J1.18
N$13: EPD_C2.1 J1.5
N$14: EPD_C1.1 J1.4
N$16: C_DELAY.1 IC1.5
N$20: D7.1 R_CAPACITOR.1
PREVGH: D5.1 EPD_C9.1 J1.21
PREVGL: D4.2 EPD_C11.1 J1.23
RESE: J1.3 Q3.2 R3.2
RESE': R2.2 R3.1 SJ1.2
RESET: C5.1 IC1.1 R_RESET.1 RESET_BUTTON.3 RESET_BUTTON.4 U2.3
RTC_RST: U2.16 U3.4
RX: TP2.TP U2.24
SCK: D10.2 J1.13 J4.P5 R6.1 TP8.TP U1.6 U2.6
SCL: J3.4 R2_PINH.1 SENSOR2.4 U2.20 U3.16 U4.7
SDA: J3.3 R1_PINH.1 SENSOR2.3 U2.19 U3.15 U4.8
SRC: C4.2 D5.2 L1.1 Q3.3
SS_SD: D8.2 J4.P2 R10.1 U2.4
TX: TP1.TP U2.25
USB_D+: D1.3 U2.14
USB_D-: D1.1 U2.13
VBAT: C2_BAT.1 MCP73831.3 Q1.3 TP3.TP U4.2 U4.3
VBUS: C1_BAT.1 C4_USB.1 C5_USB.1 CHG_LED.A D1.5 D2.2 MCP73831.4 PFMF.050.1.2 Q1.1 R1_PWRUSB.2 TP14.TP
VRTC: C8.1 C10_SUPERCAP.2 R_CAPACITOR.2 U3.14
VUSB: J2.A4 J2.A9 J2.B4 J2.B9 PFMF.050.1.1

## Tracks (layer width: path | path; a pad name or v marks a point on that pad's centre or on a via)
3V3
  Top 0.15: R_BOOT.2 65.93,102.21 52.08,102.21 49.58,99.72 R_RESET.2 49.44,99.58 49.03,99.17 43.35,99.17 IC1.2 43.21,99.03 20.91,99.03 | 20.91,99.03 20.91,100.41 21.47,100.97 R_CHANGE.2 | 20.91,99.03 20.91,90.03 | 20.91,90.03 20.91,86.42 C9.1 21.05,86.28 21.05,77.28 38.78,59.55 | 20.91,90.03 14.82,90.03 14.27,90.58 4.85,90.58 J4.P4 | 95.15,57.06 95.15,54.43 D7.2 | 89.61,62.6 95.15,57.06 | 89.61,62.6 89.61,63.02 U3.2 89.61,62.6 | 95.15,57.06 100.97,62.88 109.14,62.88 R2_PINH1.2 109.28,62.88 114.26,62.88 R1_PINH1.2 114.4,62.88 143.62,62.88 147.36,59.14 156.37,59.14 158.31,57.2 158.31,42.1 154.98,38.78 154.98,37.53 149.16,31.72 | 38.78,59.55 38.64,59.42 38.64,58.72 36.84,56.92 36.84,56.65 U1.3 36.84,56.51 36.84,56.09 37.53,55.4 37.53,36.29 | 38.78,59.55 44.04,59.55 44.46,59.14 U1.8 | U1.7 44.6,57.89 44.6,59 U1.8 | R10.2 45.7,36.29 40.72,36.29 R9.2 40.58,36.29 37.53,36.29 | R6.2 29.22,36.29 35.46,36.29 R5.2 35.59,36.29 37.53,36.29 | 89.61,62.6 86.15,59.14 44.6,59.14 U1.8 | 19.67,36.29 22.85,36.29 R7.2 | 19.67,36.29 19.11,36.29 R8.2 18.97,36.15 13.99,31.16 13.99,17.87 TP16.TP 13.99,17.73 18.56,17.73 20.08,16.2 55.26,16.2 67.59,28.53 69.94,28.53 70.5,29.09 R_CL1.2 70.64,29.22 72.44,29.22 76.17,32.96 78.53,32.96 Q2.3 78.67,33.1 79.5,33.1 86.56,40.16 127.14,40.16 131.02,44.04 | 19.67,43.21 20.22,43.77 R1.2 | 19.67,36.29 19.67,43.21 | 19.67,43.21 13.99,43.21 9,48.2 9,48.48 U2.2 | 131.02,44.04 133.51,44.04 134.48,43.07 C3.+ 134.62,42.94 136.28,41.27 139.61,41.27 C2_BAT2.1 139.75,41.13 149.16,31.72 | 149.16,31.72 162.32,18.56 165.23,18.56 J3.2 | 131.02,44.04 IC4.5
32KHZ  (via drill 0.3)
  Top 0.15: v100.5,61.75 109,61.75 R2_PINH1.1 | v92.25,61.75 91,63 U3.1 | v18,49.75 18,48.75 U2.9 | v51.75,57.75 85.5,57.75 v89.25,61.5
  Bottom 0.15: v100.5,61.75 v92.25,61.75 92,61.5 v89.25,61.5 | v18,49.75 20.25,49.75 23.25,46.75 40.75,46.75 v51.75,57.75
DN  (via drill 0.3)
  Top 0.15: v165,52.5 164,52.5 J2.B7 | v165,53.5 164,53.5 J2.A7 | v157.25,57.5 157.25,57 D1.6
  Bottom 0.15: v165,53.5 165,53 | 165,53 v165,52.5 | v157.25,57.5 162.75,57.5 165,55.25 165.25,55.25 166,54.5 166,54 165,53
DP  (via drill 0.3)
  Top 0.15: 165.25,54 165.5,53.75 165.5,53.25 165.25,53 164,53 J2.A6 | 165.25,54 164,54 J2.B6 | v157.5,54.25 157.5,54.75 D1.4 | 165.25,54 v165.5,54.25
  Bottom 0.15: v165.5,54.25 v157.5,54.25
EPD_3V3
  Top 0.15: Q2.2 76.59,32.13 81.02,32.13 81.16,32.27 C7.1 81.3,32.41 88.78,32.41 | 88.78,25.9 87.67,24.79 EPD_C5.1 | 88.78,32.41 88.78,33.24 L1.2 | 88.78,32.41 88.78,25.9 | TP17.TP 7.76,17.73 9.83,15.65 55.54,15.65 55.82,15.93 82.96,15.93 83.24,16.2 83.24,16.62 J1.16 83.38,16.76 83.79,16.76 J1.15 83.93,16.76 83.93,17.17 84.07,17.31 125.76,17.31 130.74,22.3 130.74,23.41 130.05,24.1 91,24.1 89.19,25.9 88.78,25.9
EPD_3V3_C
  Top 0.15: Q2.1 76.45,33.93 75.62,33.1 73.13,33.1 69.25,29.22 R_CL1.1 69.11,29.09 67.73,29.09 55.12,16.48 26.18,16.48 25.35,17.31 25.35,48.89 20.5,53.74 | 20.5,53.74 20.5,65.93 U2.18 | 20.5,53.74 11.36,53.74 6.92,49.31 6.92,22.99 13.99,15.93 55.4,15.93 62.33,22.85 129.5,22.85 TP13.TP
EPD_BUSY  (via drill 0.3)
  Top 0.15: v86.75,15.25 86.75,16.5 J1.9 | v79.25,65 75,69.25 75,78 | 75,78 75,106.5 TP9.TP | v16.25,72.75 10.25,66.75 10.25,66.25 U2.26 | v40.75,72.75 46.75,72.75 52,78 75,78
  Bottom 0.15: v86.75,15.25 89,15.25 89.25,15.5 89.25,21 98,29.75 98,46.25 v79.25,65 | v40.75,72.75 v16.25,72.75
EPD_CS  (via drill 0.3)
  Top 0.15: 82,12.75 80.5,11.25 60,11.25 v56.75,14.5 | 82,12.75 85.25,16 85.25,16.5 J1.12 | v41.5,29.75 40.75,29.75 D6.2 40.75,30 40.75,34.75 R9.1 40.5,35 v39.75,35.75 | v23.75,44.75 20.5,48 20.5,48.5 U2.11 | v85.75,11.75 126.5,11.75 137.5,22.75 142,22.75 TP10.TP | 82,12.75 v83,11.75
  Bottom 0.15: v41.5,29.75 v56.75,14.5 | v23.75,44.75 30.75,44.75 v39.75,35.75 | v83,11.75 v85.75,11.75
EPD_DC  (via drill 0.3)
  Top 0.15: v83.75,12.25 85.75,14.25 85.75,16.5 J1.11 | v66.5,65.25 66.5,66.75 57.25,76 TP11.TP | v17.25,43.75 16.5,43.75 13,47.25 13,48.5 U2.5
  Bottom 0.15: v83.75,12.25 75.25,12.25 70.25,17.25 | 70.25,17.25 66.5,21 v66.5,65.25 | v17.25,43.75 17.25,35.75 41.75,11.25 64.25,11.25 70.25,17.25
EPD_RST  (via drill 0.3)
  Top 0.15: 87.25,14 87.75,13.5 126.5,13.5 135.75,22.75 TP12.TP | 87.25,14 86.25,15 86.25,16.5 J1.10 | v12.25,62.25 13.25,62.25 16.5,65.5 16.5,66 U2.21 | v19,14.5 56,14.5 59.75,10.75 84,10.75 87.25,14
  Bottom 0.15: v12.25,62.25 12.25,51.75 11.25,50.75 11.25,22.25 v19,14.5
FLASH_CS  (via drill 0.3)
  Top 0.15: D9.2 35.75,30 35.75,34.75 R5.1 35.5,35 35,35.5 28.75,35.5 28.5,35.75 v28.5,49.75 28.5,52.5 35,59 36.5,59 U1.1 | v21.75,49.75 21.75,48.75 U2.12
  Bottom 0.15: v28.5,49.75 v21.75,49.75
GDR  (via drill 0.3)
  Top 0.15: v89.25,14.25 90.25,15.25 90.25,16.5 J1.2 | v71,25.25 70.25,26 Q3.1 | v69.75,32.5 68.75,33.5 R4.2
  Bottom 0.15: v89.25,14.25 82.5,14.25 81.75,15 81.75,17.75 75.25,24.25 72,24.25 71.75,24.5 | v71,25.25 71.75,24.5 | v69.75,32.5 71.75,30.5 71.75,24.5
GND  (via drill 0.3)
  Top 0.15: D12.1 19.25,28.5 22.75,28.5 D11.1 23,28.5 v24.25,29.75 | v27.25,29.75 27.75,29.75 29,28.5 D10.1 29.25,28.5 35.5,28.5 D9.1 35.75,28.5 40.5,28.5 D6.1 40.75,28.5 45.5,28.5 D8.1 45.75,28.5 46.25,28.5 52.5,34.75 68.5,34.75 R4.1 | EPD_C5.2 87.5,26.25 84,26.25 EPD_C2.2 83.75,26.25 80.25,26.25 EPD_C1.2 80,26 v79,25 | v82.75,17.5 82.75,16.75 J1.17 | v87.25,15.75 87.25,16.5 J1.8 | v79.5,21.25 67.25,21.25 66,20 66,19.75 65.5,19.25 SJ1.1 | TP4.TP 9,9 12.25,9 18.25,15 v42,15 65.25,15 R2.1 65.5,15 66.25,14.25 78.25,14.25 J1.MP2 78.5,14.25 79.5,15.25 v82.75,15.25 | 95.25,26.25 91.5,26.25 EPD_C6.2 | 95.25,26.25 99,26.25 EPD_C8.2 99.25,26.25 102.75,26.25 EPD_C9.2 103,26.25 106.5,26.25 | 95.25,26.25 EPD_C7.2 | 106.5,26.25 106.5,37.5 104.5,39.5 87,39.5 86,38.5 86,38.25 81.5,33.75 C7.2 81.25,33.75 v80.5,33 | 106.5,26.25 EPD_C10.2 106.75,26.25 110.25,26.25 EPD_C12.2 110.5,26.25 114.25,26.25 EPD_C11.2 114.5,26.25 131.25,26.25 | 157.5,6.75 157.5,8.5 SENSOR2.5 | 157.5,6.75 157.5,5.75 | 157.5,5.75 161.25,5.75 C2.2 | 157.5,5.75 C1.2 | 157.5,6.75 156,8.25 156,8.5 SENSOR2.7 156,8.75 155.25,9.5 155.25,11.5 SENSOR2.1 155.25,11.75 155.25,12.25 | 155.25,12.25 160.5,17.5 165,17.5 J3.1 | 131.25,26.25 131.25,30.75 124,38 C1_BAT1.2 | 131.25,26.25 131.25,24.25 | 131.25,24.25 131.25,22.25 123.25,14.25 92,14.25 J1.MP1 | 155.25,12.25 154.75,12.25 142.75,24.25 131.25,24.25 | C1_BAT.2 122,55 127,50 R2_BAT.1 127,50.25 128,51.25 128,55.25 | 128,55.25 127.5,55.75 127.25,55.75 MCP73831.2 | U4.1 143,53.75 142.25,54.5 U4.9 | U4.6 141.5,54.75 142,54.75 U4.9 | 142.5,55 142.25,54.75 U4.9 | 142.5,55 142.75,55.25 143,55.25 U4.4 143.25,55.25 146,55.25
  Top 0.15: 133.25,57 140.5,57 142.5,55 | 133.25,57 132.75,57 C2_BAT.2 | 142.5,55 U4.9 | 128,55.25 131.5,55.25 133.25,57 | v150,58.25 149.25,58.25 C5_USB.2 | v150,56.75 149.25,56 C4_USB.2 149.25,55.75 149.25,52.5 150.75,51 R2-USB1.1 150.5,50.75 149.25,49.5 149.25,48.5 R2-USB.2 149,48.25 145.25,48.25 139.75,42.75 C2_BAT2.2 139.5,42.75 137.75,42.75 134.75,45.75 C3.- 134.5,45.75 131.5,45.75 129,43.25 128.25,43.25 IC4.2 128,43.25 126.25,41.5 122,41.5 R1_PWRUSB.1 121.75,41.5 121.5,41.75 90.75,41.75 D3.1 90.5,41.75 90,41.25 87,41.25 v80.5,34.75 | v156.5,55.75 155,55.75 D1.2 | v146.5,55.25 146,55.25 | 164,50 164,50.25 J2.B12 | 164,50 164,48.75 164.5,48.25 J2.MP3 164.75,48.25 168.25,48.25 J2.MP1 168.5,48.25 168.5,58.25 J2.MP2 168.25,58.5 164.75,58.5 J2.MP4 | 164,50 J2.A1 | 164,56.75 164,56.5 J2.B1 | 164,57.75 164,56.75 | 164,57.75 164.5,58.25 J2.MP4 | 164,56.75 J2.A12 | C8.2 88.5,66 142.25,66 144.75,63.5 TP5.TP 152.5,63.5 156.25,59.75 | 164,57.75 158.25,57.75 156.25,59.75 | 164,57.75 J2.MP4 | 156.25,59.75 v156.5,59.75 | BOOT_BUTTON.2 65.75,108.25 62.5,108.25 BOOT_BUTTON.1 62.25,108.25 51,108.25 RESET_BUTTON.2 50.75,108.25 47.5,108.25 RESET_BUTTON.1 | IC1.3 43.5,100.25 43.5,104.25 47.25,108 RESET_BUTTON.1 | RESET_BUTTON.1 47.25,108.25 26,108.25 CHANGE_BUTTON.2 25.75,108.25 22.5,108.25 CHANGE_BUTTON.1 22.5,108 v22.5,102 | 22.25,92.25 22.25,86.5 C9.2 | 22.25,92.25 22.25,94 21.75,94.5 C10.2 21.75,94.75 v23,96 | C_DELAY.2 38.25,94.75 49.5,94.75 C5.2 49.75,94.5 52,92.25 | 52,92.25 62,92.25 C6.2 | 52,92.25 22.25,92.25 | v14.25,86.75 15.25,85.75 J4.G1 | J4.G2 15.25,91.25 v14.25,91.25 7,91.25 5.5,92.75 5,92.75 J4.P6
  Top 0.15: 4.5,93 4.75,93 J4.P6 | 4.5,93 2,95.5 J4.G4 | 4.5,93 1.25,89.75 1.25,82.75 J4.G3 1.25,82.5 1.25,72.5 7.5,66.25 U2.28 7.75,66 7.75,61.5 12,57.25 U2.29_3 12.25,57.25 13.25,57.25 U2.29_6 13.5,57.25 14.5,57.25 U2.29_9 14.75,57 14.75,56 U2.29_8 14.75,55.75 14.75,54.75 U2.29_7 | 4.5,93 J4.P6 | 87,52.5 87,53.75 U3.13 | 87,52.5 87,50.75 88.25,49.5 93.75,49.5 96.25,52 99,52 C10_SUPERCAP.1 99.25,52.25 106.75,59.75 145.25,59.75 146,59 146,55.25 | v36.75,54.5 U1.4 | v38,54.5 40.5,57 U1.9 40.75,57 45,57 49.5,52.5 87,52.5 | 12.25,55.25 12.25,55.75 U2.29_2 | 12.25,55.25 12.25,54.75 | 13.5,54.75 13.5,55.75 U2.29_5 | 12.25,54.75 13.25,54.75 U2.29_4 13.5,54.75 | 12.25,54.75 U2.29_1 | 13.5,54.75 14.5,54.75 U2.29_7 | v7.75,47.25 7.75,48.5 U2.1 | 12.25,55.25 v7.75,50.75 | v19.5,54.5 14.75,54.5 U2.29_7
  Bottom 0.15: v24.25,29.75 v27.25,29.75 v42,15 | 83.25,17.5 85.5,17.5 v87.25,15.75 | 83.25,17.5 v82.75,17.5 v82.75,15.25 | 83.25,17.5 v79.5,21.25 79,21.75 v79,25 79,31.5 v80.5,33 v80.5,34.75 | v150,56.75 v150,58.25 | v150,56.75 151,55.75 v156.5,55.75 v156.5,59.75 | v146.5,55.25 148.5,55.25 v150,56.75 | v14.25,86.75 v14.25,91.25 14.25,92 22.25,100 22.5,100 | v38,54.5 v36.75,54.5 v19.5,54.5 | v7.75,50.75 v7.75,47.25 | v23,96 23,99.75 22.75,100 22.5,100 | 22.5,100 v22.5,102
  pour Top: -0.04,0.06 -0.06,0.04 -0.08,0.02 -0.08,-0.02 -0.06,-0.04 -0.04,-0.06 -0.02,-0.08 76,-0.08 76.02,-0.06 76.04,-0.04 76.06,-0.02 76.06,0.02 76.04,0.04 76.02,0.06 76,0.08 -0.02,0.08
  pour Top: 6.41,48.22 6.39,48.2 6.37,48.18 0.08,48.18 0.08,0.08 75.9,0.08 75.9,10.02 75.92,10.04 75.94,10.06 75.96,10.08 94,10.08 94.02,10.06 94.04,10.04 94.06,10.02 94.06,0.08 170.12,0.08 170.12,67.12 92.18,67.12 92.16,67.14 92.14,67.16 92.12,67.18 92.12,111.12 67.36,111.12 67.36,110.47 67.35,110.45 67.32,110.43 67.3,110.41 20.59,110.41 20.57,110.43 20.54,110.45 20.53,110.47 20.53,111.12 0.08,111.12 0.08,66.12 6.37,66.12 6.39,66.1 6.41,66.08 6.43,66.06 6.43,48.24
  pour Bottom: 6.41,48.22 6.39,48.2 6.37,48.18 0.08,48.18 0.08,0.08 75.9,0.08 75.9,10.02 75.92,10.04 75.94,10.06 75.96,10.08 94,10.08 94.02,10.06 94.04,10.04 94.06,10.02 94.06,0.08 170.12,0.08 170.12,67.12 92.18,67.12 92.16,67.14 92.14,67.16 92.12,67.18 92.12,111.12 67.36,111.12 67.36,110.47 67.35,110.45 67.32,110.43 67.3,110.41 20.59,110.41 20.57,110.43 20.54,110.45 20.53,110.47 20.53,111.12 0.08,111.12 0.08,66.12 6.37,66.12 6.39,66.1 6.41,66.08 6.43,66.06 6.43,48.24
GPIO8
  Top 0.15: R1.1 20.5,42.75 21,43.25 21,46.25 19.25,48 19.25,48.5 U2.10
I2C_PW  (via drill 0.3)
  Top 0.15: 152.25,5.75 153.5,5.75 R2_PINH.2 | 152.25,5.75 150,5.75 R1_PINH.2 | 152.25,5.75 154,7.5 | 154,7.5 155,8.5 SENSOR2.8 | 154,7.5 154.25,7.5 157.25,4.5 C1.1 157.5,4.5 161.25,4.5 C2.1 161.5,4.5 162,5 162,6.25 158.75,9.5 156.5,9.5 | 156.5,9.5 156.5,10.5 v156.25,10.75 156,11 156,11.5 SENSOR2.2 | 156.5,9.5 156.5,8.75 SENSOR2.6 | v21.75,67.25 21.75,66.25 U2.17
  Bottom 0.15: v21.75,67.25 91.5,67.25 93.75,65 157.25,65 166.5,55.75 166.5,21 v156.25,10.75
INT_RTC  (via drill 0.3)
  Top 0.15: v110.25,61.75 114.25,61.75 R1_PINH1.1 | v107.5,64.5 89.25,64.5 88.5,63.75 88.5,63.25 U3.3 88.25,63 87.5,62.25 87.5,62 85.25,59.75 v44.5,59.75 | v16.75,44.25 16.75,48.5 U2.8 16.75,48.75 16.75,49.25 v17.25,49.75 | v16.75,21.5 20.25,18 TP15.TP
  Bottom 0.15: v107.5,64.5 v110.25,61.75 | v16.75,21.5 v16.75,44.25 | v44.5,59.75 18.75,59.75 17.25,58.25 v17.25,49.75
IO/BOOT  (via drill 0.3)
  Top 0.15: BOOT_BUTTON.4 62.5,109.5 63.5,109.5 63.75,109.25 65.5,109.25 65.75,109.5 BOOT_BUTTON.3 66,109.5 66.75,108.75 66.75,103 | 66.75,103 66.75,95.5 62.25,91 C6.1 62,90.75 58,90.75 v33.5,66.25 | 66.75,103 66.25,103.5 R_BOOT.1 | v25.75,66.25 24.25,66.25 U2.15
  Bottom 0.15: v33.5,66.25 v25.75,66.25
IO/CHANGE  (via drill 0.3)
  Top 0.15: CHANGE_BUTTON.3 25.75,109.5 22.5,109.5 CHANGE_BUTTON.4 22.25,109.5 21.75,109 21.5,109 21.25,108.75 21.25,102.5 22.25,101.5 22.25,99.5 | v21.75,92.5 21.75,93.25 C10.1 | 22.25,99.5 21.75,99.5 R_CHANGE.1 | 22.25,99.5 v22.5,99.5 | v14.25,68.75 14.25,66.25 U2.23
  Bottom 0.15: 21.75,93.5 21.75,98.75 v22.5,99.5 | 21.75,93.5 v21.75,92.5 | v14.25,68.75 14.25,86 21.75,93.5
MISO  (via drill 0.3)
  Top 0.15: D12.2 19,30 19,34.75 R8.1 19.25,35 21.75,35 22.25,35.5 23.25,35.5 24.25,36.5 24.25,46.5 v23.5,47.25 | v34.75,58 36.5,58 U1.2 | v17.75,58 15.75,58 9,64.75 9,66 U2.27 8.75,66.25 8.75,75.75 v6.25,78.25 | v6.25,93.75 5,93.75 J4.P7 | v39.75,53.5 44.25,49 97.75,49 108,59.25 123,59.25 123.75,58.5 144.75,58.5 TP6.TP
  Bottom 0.15: v17.75,58 19,58 | 19,58 v34.75,58 35.25,58 v39.75,53.5 | v6.25,78.25 v6.25,93.75 | v23.5,47.25 19,51.75 19,58
MOSI  (via drill 0.3)
  Top 0.15: v58.5,13.5 81.75,13.5 84.25,16 84.25,16.5 J1.14 | 23,34.75 v23.5,34.25 | v44.5,49.5 44.5,55.25 U1.5 | 23,34.75 23,30 D11.2 | 23,34.75 R7.1 | v37.25,60.25 8,89.5 5,89.5 J4.P3 | v15.5,46.25 15.5,48.5 U2.7 | v79.25,65.75 85,71.5 85,106.5 TP7.TP
  Bottom 0.15: v58.5,13.5 44.25,13.5 32.5,25.25 | 32.5,25.25 v23.5,34.25 23.5,38.25 v15.5,46.25 | 32.5,25.25 44.5,37.25 v44.5,49.5 52.25,57.25 52.25,58 | v37.25,60.25 50,60.25 52.25,58 | v79.25,65.75 60,65.75 52.25,58
N$1  (via drill 0.3)
  Top 0.15: v78.75,16.5 79.25,16.5 J1.24 | EPD_C12.1 v109.5,24.75
  Bottom 0.15: v78.75,16.5 82.5,12.75 97.5,12.75 v109.5,24.75
N$2  (via drill 0.3)
  Top 0.15: v80.25,17.5 80.25,16.75 J1.22 | EPD_C10.1 v105.75,24.75
  Bottom 0.15: v80.25,17.5 80.25,15.5 82.5,13.25 94.25,13.25 v105.75,24.75
N$3  (via drill 0.3)
  Top 0.15: v149.25,51.75 149.25,51 R2-USB1.2 | v165,51.75 164.75,52 164,52 J2.A5
  Bottom 0.15: v165,51.75 v149.25,51.75
N$4
  Top 0.15: CHG_LED.C 121.25,58.5 R1_BAT.1
N$5  (via drill 0.3)
  Top 0.15: v125.25,39.25 125.25,38.25 C1_BAT1.1 | D2.1 125.75,40.75 v126.75,40.75 128,42 IC4.3 | Q1.2 139.25,49.75 138.5,49 134.25,49 129.5,44.25 128.25,44.25 IC4.1 128,44.25 v126.75,43
  Bottom 0.15: v125.25,39.25 v126.75,40.75 v126.75,43
N$6  (via drill 0.3)
  Top 0.15: C4.1 104,37.25 99,37.25 D4.1 96,34.5 v95.25,35.25 | v88.75,41.75 87.25,41.75 D3.2
  Bottom 0.15: v95.25,35.25 v88.75,41.75
N$7
  Top 0.15: R1_BAT.2 122.75,58.25 123.5,58.25 124.25,57.5 125,57.5 126,56.5 126,55.5 126.5,55 127,55 MCP73831.1
N$8  (via drill 0.3)
  Top 0.15: v81.25,17.5 81.25,16.75 J1.20 | EPD_C8.1 v100.5,24.75
  Bottom 0.15: v81.25,17.5 81.25,15 82.5,13.75 89.5,13.75 v100.5,24.75
N$9
  Top 0.15: R2_BAT.2 127,52.25 124.5,54.75 MCP73831.5
N$10  (via drill 0.3)
  Top 0.15: v81.75,21.75 81.75,16.75 J1.19 | v92.75,25.25 94.75,25.25 EPD_C7.1
  Bottom 0.15: v81.75,21.75 85.25,25.25 v92.75,25.25
N$11  (via drill 0.3)
  Top 0.15: v153.5,52.25 150.75,49.5 150.75,48.5 R2-USB.1 | v165,54.75 164.75,55 164,55 J2.B5
  Bottom 0.15: v153.5,52.25 154.75,52.25 157.25,54.75 v165,54.75
N$12  (via drill 0.3)
  Top 0.15: v89.75,22.25 86.75,22.25 82.25,17.75 82.25,16.75 J1.18 | EPD_C6.1 v92.25,24.75
  Bottom 0.15: v92.25,24.75 v89.75,22.25
N$13  (via drill 0.3)
  Top 0.15: v88.75,15.75 88.75,16.5 J1.5 | v84.75,24 84,24.75 EPD_C2.1
  Bottom 0.15: v88.75,15.75 88.75,20 v84.75,24
N$14  (via drill 0.3)
  Top 0.15: v88,15.75 88.5,15.25 89,15.25 89.25,15.5 89.25,16.5 J1.4 | v84.25,23.5 81.5,23.5 80.25,24.75 EPD_C1.1
  Bottom 0.15: v88,15.75 88,19.75 v84.25,23.5
N$16
  Top 0.15: C_DELAY.1 38,93.5 37.25,94.25 37.25,95 40.5,98.25 IC1.5
N$20
  Top 0.15: R_CAPACITOR.1 88.25,50.75 89,50 93,50 95.25,52.25 D7.1
PREVGH  (via drill 0.3)
  Top 0.15: v80.25,18.25 80.75,17.75 80.75,16.75 J1.21 | D5.1 96,38 v93.75,35.75 93.75,35.25 v101.75,27.25 | v101.75,25.75 102.75,24.75 EPD_C9.1
  Bottom 0.15: v80.25,18.25 69.75,18.25 67.75,20.25 67.75,31.25 72.25,35.75 v93.75,35.75 | v101.75,27.25 v101.75,25.75
PREVGL  (via drill 0.3)
  Top 0.15: v81,21.75 79.75,20.5 79.75,16.75 J1.23 | v97.5,32.25 D4.2 99.75,34.25 v102,34.25 | v111.5,24.75 EPD_C11.1
  Bottom 0.15: v81,21.75 91.5,32.25 v97.5,32.25 | v102,34.25 v111.5,24.75
RESE  (via drill 0.3)
  Top 0.15: v89.75,15.5 89.75,16.5 J1.3 | Q3.2 v75.25,24.75 | v74.5,33.75 73.75,33.75 R3.2
  Bottom 0.15: v89.75,15.5 89,14.75 82.5,14.75 82.25,15 82.25,17.75 v75.25,24.75 74.5,25.5 v74.5,33.75
RESE'  (via drill 0.3)
  Top 0.15: v67.5,15.25 66.75,15.25 R2.2 | v67.5,17.75 67.5,18.5 67,19 SJ1.2 67,19.25 v68.25,20.5 | v71.25,30 73.5,32.25 R3.1
  Bottom 0.15: v67.5,17.75 v67.5,15.25 | v71.25,30 71.25,26.25 68.25,23.25 v68.25,20.5
RESET  (via drill 0.3)
  Top 0.15: 48.75,109.25 48.5,109.5 47.5,109.5 RESET_BUTTON.4 | 48.75,109.25 50.5,109.25 50.75,109.5 RESET_BUTTON.3 | R_RESET.1 49.5,98.25 43.5,98.25 IC1.1 43.25,98 42.5,98.75 40,98.75 36.75,95.5 36.75,93.5 | 36.75,93.5 37.5,92.75 38.75,92.75 39.25,93.25 49.5,93.25 C5.1 | v13.75,53.25 10.25,49.75 10.25,48.75 U2.3 | 36.75,93.5 v36.25,93.5 | v48.75,108.75 48.75,109.25
  Bottom 0.15: v13.75,53.25 13.75,67.5 15.75,69.5 15.75,73 v36.25,93.5 48.75,106 v48.75,108.75
RTC_RST  (via drill 0.3)
  Top 0.15: v23,67.75 23,66.25 U2.16 | v82.75,67.75 86.75,63.75 86.75,63.25 U3.4
  Bottom 0.15: v82.75,67.75 v23,67.75
RX  (via drill 0.3)
  Top 0.15: v12.75,62.75 12.75,66 U2.24 | v19.5,10.25 19.5,9.25 19.25,9 TP2.TP
  Bottom 0.15: v12.75,62.75 12.75,21.5 19.5,14.75 v19.5,10.25
SCK  (via drill 0.3)
  Top 0.15: v60,12.75 81.5,12.75 84.75,16 84.75,16.5 J1.13 | U1.6 44.5,56.5 42,54 39.5,54 39.25,53.75 39.25,44 46.5,36.75 46.5,29.25 v43.5,29.25 29.75,29.25 29.25,29.75 D10.2 29.25,30 29.25,34.75 R6.1 29,34.75 28,35.75 28,38 | 26.5,66.25 28,64.75 28,38 | 26.5,66.25 24.5,68.25 22.5,68.25 3.75,87 3.75,91 4.25,91.5 5,91.5 J4.P5 | v14.25,49.75 14.25,48.75 U2.6 | 28,38 v26,38 | v80,103.25 80,106.5 TP8.TP | 26.5,66.25 v28.5,68.25
  Bottom 0.15: v43.5,29.25 v60,12.75 | v26,38 v14.25,49.75 | v80,103.25 45,68.25 v28.5,68.25
SCL  (via drill 0.3)
  Top 0.15: 159.25,9.75 157.5,11.5 SENSOR2.4 | 159.25,9.75 162.5,6.5 162.5,4.5 161.75,3.75 157,3.75 156.5,4.25 153.75,4.25 R2_PINH.1 | v139.25,52.75 139.75,53.25 | 139.75,53.25 140.75,54.25 141.25,54.25 U4.7 | 165,21.25 165,20.75 J3.4 | 165,21.25 v165,27 | 159.25,9.75 166.75,17.25 166.75,19.5 165,21.25 | v18,67.25 18,66.25 U2.20 | v90.75,55.75 90.75,54 U3.16 | 139.75,53.25 138.75,54.25 v128.5,54.25
  Bottom 0.15: v165,27 v139.25,52.75 | v18,67.25 21,67.25 21.5,66.75 79.75,66.75 v90.75,55.75 92.25,54.25 v128.5,54.25
SDA  (via drill 0.3)
  Top 0.15: v140.75,53.25 141.25,53.75 U4.8 | 164.25,28.5 164.25,20.25 165,19.5 J3.3 165.25,19.5 165.75,19.5 166.25,19 166.25,17.25 166,17 161.75,17 156.75,12 156.75,11.75 SENSOR2.3 | 164.25,28.5 v164.25,29.75 | 164.25,28.5 167.25,25.5 167.25,8.75 161.75,3.25 153.75,3.25 152.75,4.25 150,4.25 R1_PINH.1 | v19.25,64.75 19.25,66 U2.19 | v89.5,56.25 89.5,54 U3.15
  Bottom 0.15: v164.25,29.75 v140.75,53.25 92.5,53.25 v89.5,56.25 79.5,66.25 60,66.25 58.5,64.75 v19.25,64.75
SRC  (via drill 0.3)
  Top 0.15: C4.2 100.25,38.75 99.75,38.25 D5.2 99.5,38.25 97.25,38.25 96.75,38.75 89.75,38.75 89,38 L1.1 88.75,37.75 v86.25,35.25 | v82.75,31.75 76.5,25.5 72.25,25.5 Q3.3
  Bottom 0.15: v86.25,35.25 v82.75,31.75
SS_SD  (via drill 0.3)
  Top 0.15: D8.2 45.75,30 45.75,34.75 R10.1 45.5,35 v41.5,35 | v13.25,52 11.75,50.5 11.75,48.75 U2.4 | v13.25,80.5 5.5,88.25 J4.P2
  Bottom 0.15: v13.25,80.5 v13.25,52 30.25,35 v41.5,35
TX  (via drill 0.3)
  Top 0.15: v17,72.25 11.75,67 11.75,66.25 U2.25 | v48.25,72.25 52,76 TP1.TP
  Bottom 0.15: v48.25,72.25 v17,72.25
USB_D+  (via drill 0.3)
  Top 0.15: v154.75,54.25 154.75,54.75 D1.3 | v106,56.5 98,48.5 v39.75,48.5 | v24.75,47.25 24.75,48 24.25,48.5 U2.14
  Bottom 0.15: v154.75,54.25 144.5,54.25 142.25,56.5 v106,56.5 | v39.75,48.5 26,48.5 v24.75,47.25
USB_D-  (via drill 0.3)
  Top 0.15: v156,56.25 155.5,56.75 155,56.75 D1.1 | v107.25,57 96.5,46.25 v39.75,46.25 | v23.75,46.25 23,47 23,48.5 U2.13
  Bottom 0.15: v156,56.25 154.25,56.25 150.25,60.25 110.5,60.25 v107.25,57 | v23.75,46.25 v39.75,46.25
VBAT  (via drill 0.3)
  Top 0.15: MCP73831.3 127.25,57 131.25,57 C2_BAT.1 131.5,57 v131.5,56 | 143.25,54.75 143.25,54.25 U4.2 | v138.5,53.75 138.5,52 Q1.3 138.25,51.75 v138.25,50.75 | 143.25,54.75 v144,54 | 143.25,54.75 U4.3 | v17.5,9 14,9 TP3.TP
  Bottom 0.15: v144,54 143.75,53.75 v138.5,53.75 136.25,56 v131.5,56 | v17.5,9 74.25,9 76.5,11.25 98.75,11.25 v138.25,50.75
VBUS
  Top 0.15: 147.92,57.34 147.92,55.95 C4_USB.1 147.92,55.82 145.56,53.46 141.82,53.46 138.22,49.86 137.53,49.86 Q1.1 137.39,49.72 132.41,49.72 125.76,43.07 D2.2 125.62,42.94 125.34,42.66 122.02,42.66 R1_PWRUSB.2 121.88,42.52 119.39,42.52 | 147.92,57.34 147.92,58.31 C5_USB.1 | 147.92,57.34 154.01,57.34 | 154.01,57.34 155.67,57.34 157.06,55.95 157.34,55.95 D1.5 | 154.01,57.34 154.01,39.47 PFMF.050.1.2 | MCP73831.4 124.37,56.78 122.16,56.78 122.02,56.65 C1_BAT.1 121.88,56.51 120.63,55.26 119.39,55.26 CHG_LED.A 119.39,42.52 | 119.39,42.52 80.75,42.52 56.09,17.87 26.73,17.87 TP14.TP
VRTC  (via drill 0.3)
  Top 0.15: v87,64.5 87,66 C8.1 | v88.25,59 88.25,54 U3.14 88.5,53.75 88.5,53 89.5,52 89.5,51 R_CAPACITOR.2 91.75,53 95,53 96.25,54.25 99,54.25 C10_SUPERCAP.2
  Bottom 0.15: v87,64.5 87,60.25 v88.25,59
VUSB
  Top 0.15: J2.A4 163.98,50.83 163.98,50.97 J2.B9 | J2.A9 163.98,55.82 163.98,55.68 J2.B4 163.84,55.54 163.29,55.54 163.15,55.4 163.15,51.38 163.43,51.11 | 163.43,51.11 163.84,51.11 J2.B9 | 163.43,51.11 158.58,46.26 158.58,39.47 PFMF.050.1.1 | 163.43,51.11 J2.B9